# Altium PCB PCB.PcbDoc (part 2 of 5)
Units mil, origin at the board's own origin, x right, y up, seen from the top; angles counter-clockwise.
Board outline 7500 x 6500 mil, 2 copper layers (Top Layer, Bottom Layer); 229 components, 273 nets, 1476 pads, 506 vias.
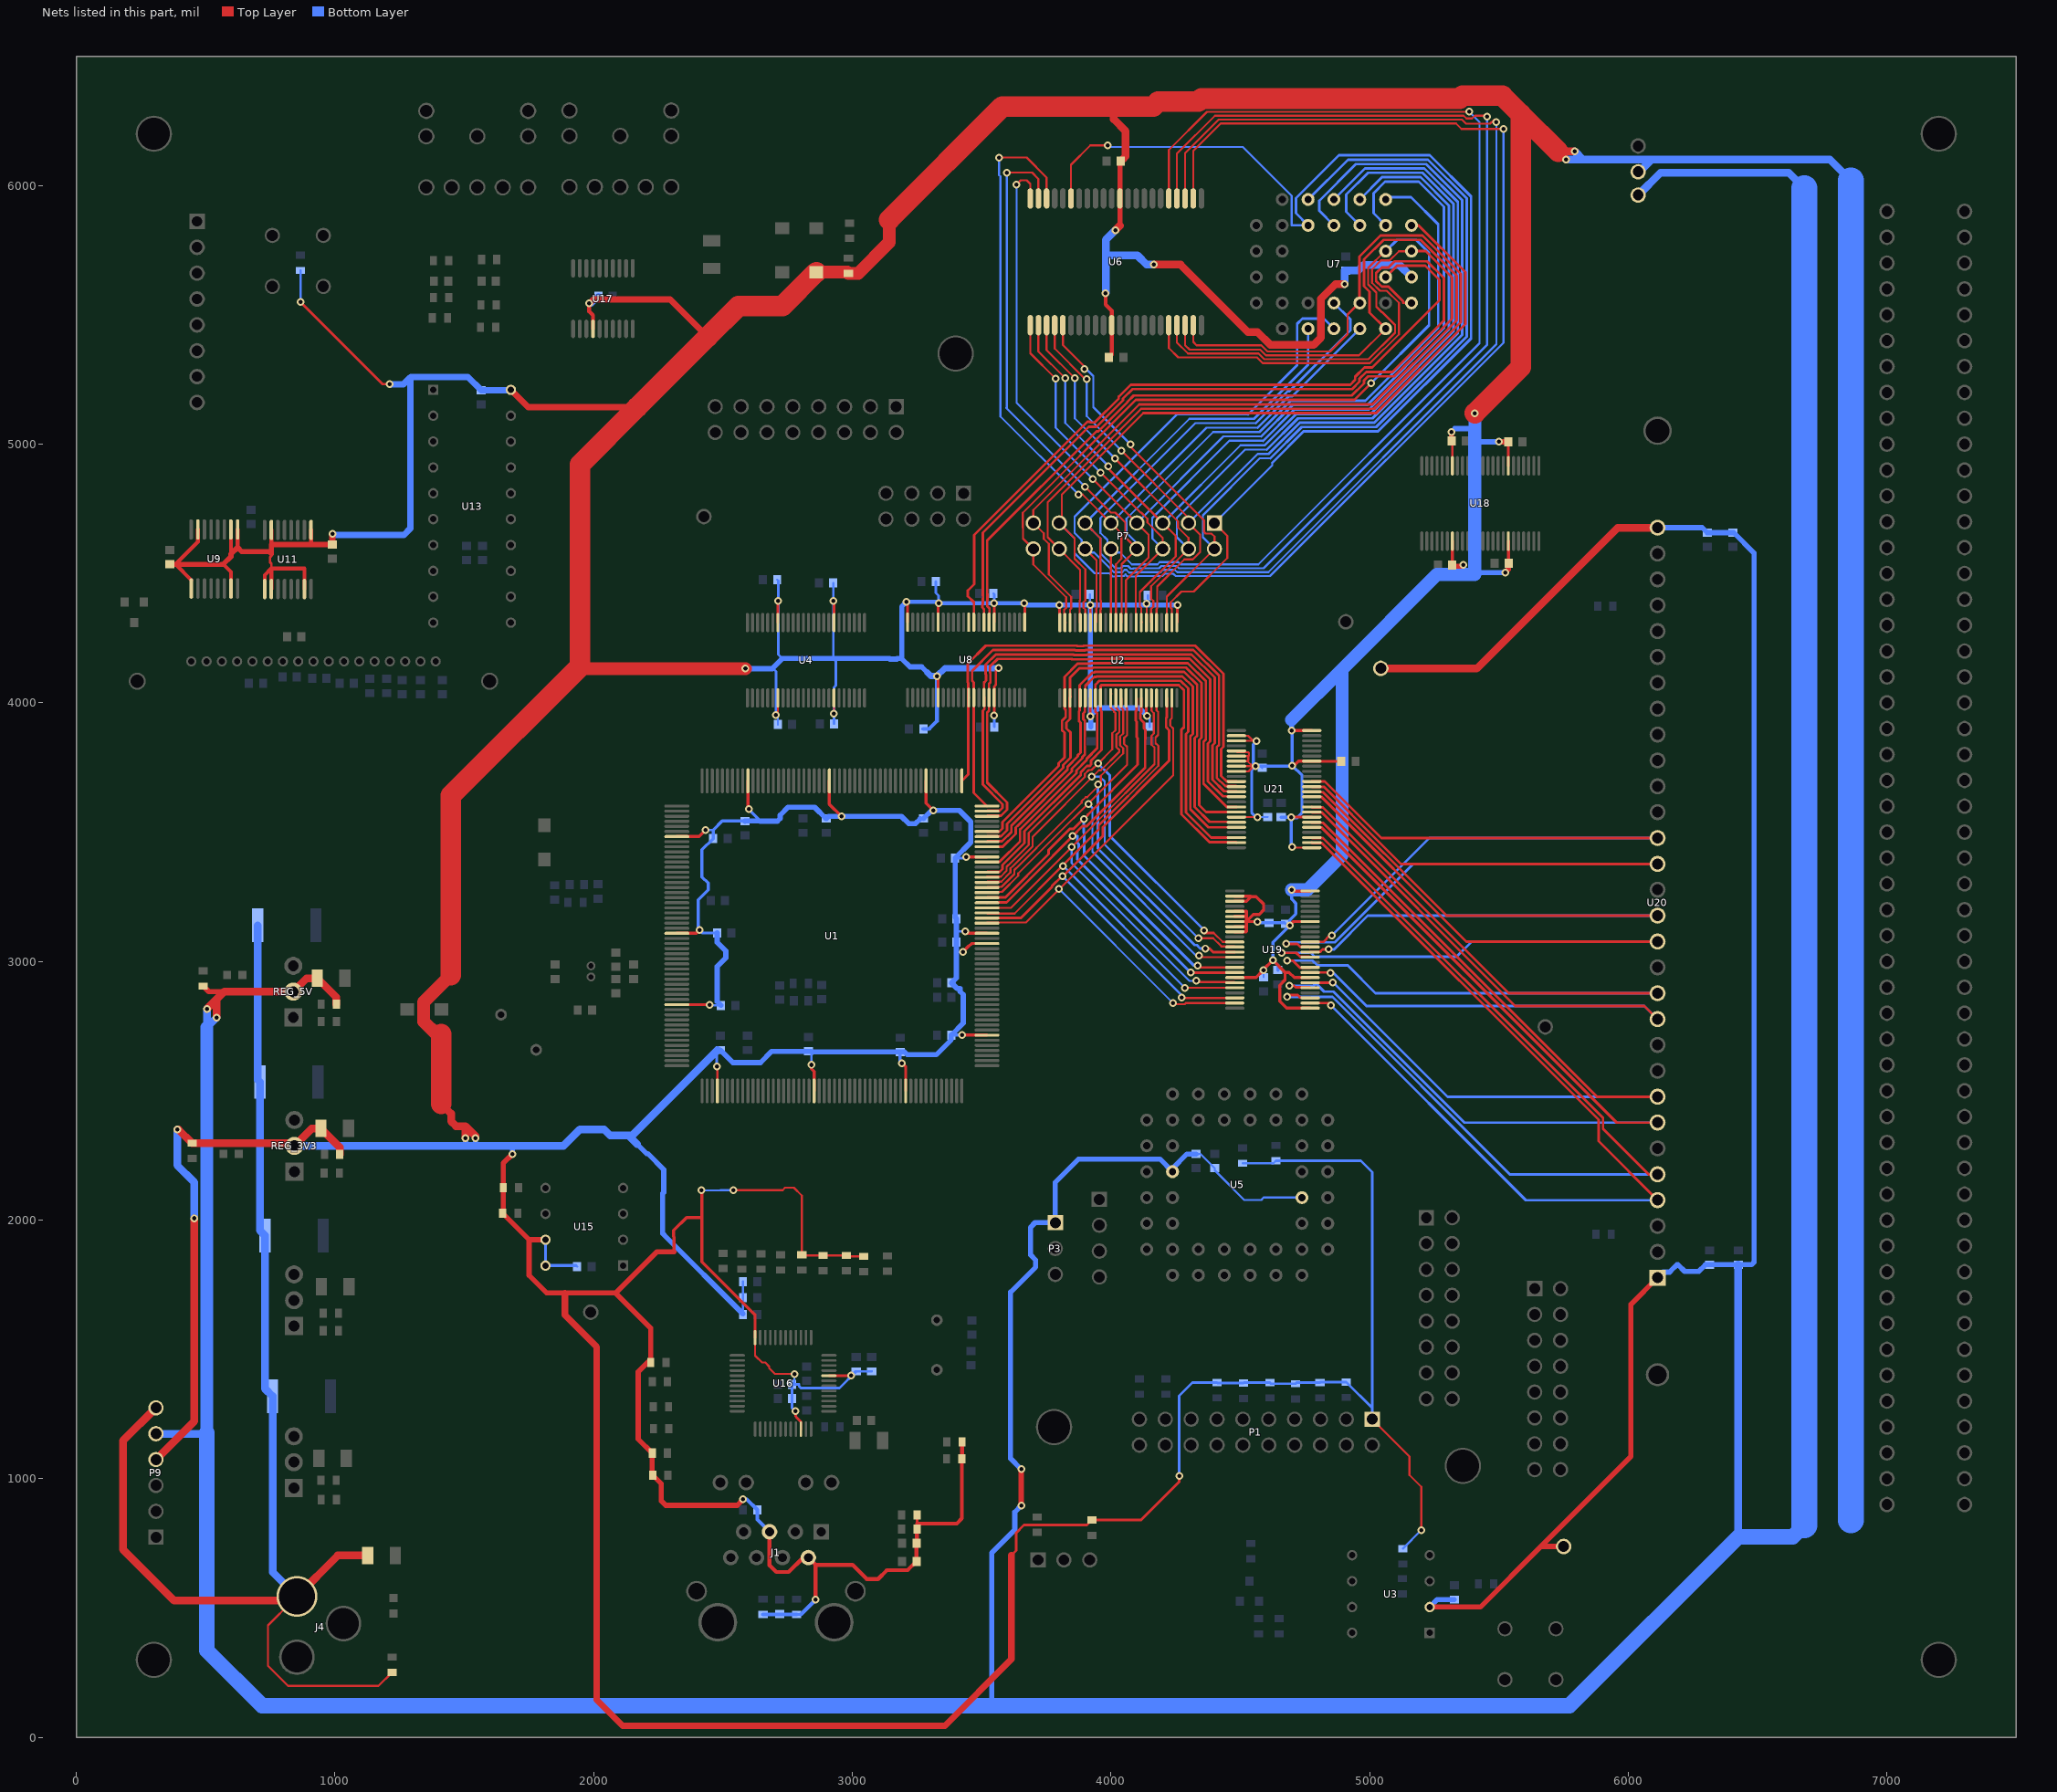
[diagram p2: the nets of this part, all layers, seen from the top]

## Via types
v1: diameter 30, hole 16, Top Layer to Bottom Layer, 500 vias
v2: diameter 30, hole 16, Top Layer to Bottom Layer, tented top, 6 vias

## Nets (pads, with @x,y where several pads share a name; then routed paths per layer and width w, separated by ;. In a path a pad name is that pad's centre, name@x,y a point inside that pad or via, vN(x,y) a via of type N, cw(c..) or ccw(c..) an arc to the next point about the centre after c; other vN are vias at no path point) (continued)
3V3: C1.1 C2.1 C3.1 C4.1 C6.1 C8.1 C10.1 C12.1 C14.1 C16.1 C18.1 C20.1 C21.1 C24.1 C25.1 C33.1 C34.1 C35.1 C36.1 C37.1 C38.1 C49.1 C50.1 C51.1 C52.1 C55.1 C58.1 C67.1 C68.1 C69.1 C70.1 C76.2 C80.1 C81.1 C82.1 C85.1 C86.1 C87.1 C88.1 C89.1 C90.1 C91.1 C92.1 C93.1 C94.1 C95.1 C96.1 C97.1 C98.1 C99.1 C100.1 C101.1 C102.1 C103.1 C104.1 C105.1 C106.1 C107.1 J1.2 J1.5 L1.2 P1.1 P9.4 pad.3V3_TEST_1 R3.2 R5.2 R7.2 R8.2 R9.2 R10.2 R11.2 R12.2 R15.2 R16.2 R17.2 R18.1 R22.1 R23.1 R27.2 R28.1 R29.1 R30.2 R34.2 R41.2 R42.2 R43.2 R44.2 R45.2 R46.2 R51.2 R59.2 R63.2 R70.2 REG_3V3.2 U1.7 U1.26 U1.40 U1.56 U1.75 U1.93 U1.111 U1.129 U1.131 U1.146 U1.164 U1.183 U1.199 U2.1 U2.7 U2.18 U2.24 U2.31 U2.42 U4.7 U4.18 U4.31 U4.42 U6.11 U6.33 U7.32 U8.1 U8.7 U8.18 U8.24 U8.31 U8.42 U9.1 U9.2 U9.7 U9.9 U9.15 U11.1 U11.2 U11.7 U11.9 U11.15 U13.20 U15.7 U15.8 U16.22 U16.32 U16.48 U17.14 U18.7 U18.18 U18.31 U18.42 U19.1 U19.7 U19.18 U19.24 U19.26 U19.27 U19.29 U19.30 U19.31 U19.32 U19.33 U19.42 U21.1 U21.7 U21.18 U21.24 U21.26 U21.27 U21.29 U21.30 U21.31 U21.32 U21.33 U21.42 | length 63039.9
  Top Layer w8: U9.9@444.43,4441.83 U9.9@444.43,4474.45 ; 754.02,4611.98 754.44,4611.56 ; R17.2@1648.47,2026 R17.2@1650.47,2028 ; v1@2413,2112 v1(2416,2115) ; v1(2476,2594) v1@2478.27,2591.73 ; v1(2540,2116) 2731.02,2116 2740.02,2125 2773.98,2125 2805,2093.98 R27.2@2805,1865.53 2807,1863.53 R34.2@2887,1863.53 R30.2@2977,1863.53 2981,1859.53 R23.1@3044,1859.53 ; v1@2577,919 v1(2578,920) ; U16.48@2624.2,1546 2624.2,1476.03 2651.23,1449 2663.77,1449 2679,1433.77 2679,1427.23 2701.23,1405 v1(2776,1405) ; v1(2705,3952) 2707.12,3952 2712.52,3957.4 U4.31@2712.52,4018.66 ; v1@2712.52,4392.52 v1(2714,4394) ; v1(2929.06,3957.94) U4.42@2929.06,4018.66 ; v1(3327,4103) v1@3331.89,4098.11 ; U2.24@3801,4311.21 U2.24@3802.21,4310 ; U2.31@3920,4018.35 U2.31@3920.32,4018.66 ; v1(3920,4378) 3920,4310.32 U2.18@3920.32,4310 ; v1@4136.85,3945.85 v1(4140,3949) ; U2.7@4136.85,4310 4138,4311.15 v1(4138,4383) ; U2.1@4254.96,4310 U2.1@4257,4312.04 ; U21.42@4485,3557.84 4485.16,3558 v1(4566,3558) ; U21.33@4485,3735 4532.12,3735 4549.12,3752 v1@4550,3752 ; U21.32@4485,3754.69 v1@4547.32,3754.69 ; U21.31@4485,3774.37 4527.63,3774.37 ; U21.30@4485,3794.06 4530.95,3794.06 ; U21.29@4485,3813.74 4489.63,3809.11 4530.08,3809.11 4532.19,3807 4533.26,3807 4533.26,3796.37 4530.95,3794.06 ; U21.27@4485,3853.11 v1@4549.89,3853.11 ; U21.26@4485,3872.8 4530.21,3872.8 v1@4549.89,3853.11 ; 4522.32,3173.74 4523.58,3175 ; 4522.95,3134.37 4523.58,3135 ; v1(4558.64,3754.36) 4552.36,3754.36 v1@4550,3752 ; v1(4563,3852) 4551,3852 v1@4549.89,3853.11 ; v1(4691,3139) v1@4701,3139 ; v1(4698,3277) v1@4702.83,3272.17 ; v1(4700,3442) 4702.27,3439.73 U21.1@4776.34,3439.73 ; v1(4701,3757) v1@4708,3757 ; U21.18@4776.34,3774.37 4777.12,3773.59 U21.18@4777.71,3773 ; P1.1@5010,1230 5154,1086 5154,1014.79 5200,968.79 v1(5200,801.53) ; C50.1@5316.44,5012 C50.1@5319.69,5008.76 ; C100.1@5318.56,4532 C100.1@5319.69,4533.13 ; C99.1@5535.44,5009 C99.1@5536.22,5008.22 ; C14.1@5536.22,4541.34 C14.1@5537.56,4540 ; 4522.82,3154.06 4523.58,3154.81 4523.58,3154.06 ; 4522.82,3154.06 4521.52,3154.06 4523.58,3152 4523.58,3154.06 ; 4522.82,3154.06 4523.58,3154.06 ; 4527.63,3774.37 v1@4547.32,3754.69 ; 4527.63,3774.37 4530.95,3777.69 4530.95,3794.06 ; v1@4547.32,3754.69 v1@4550,3752
  Top Layer w10: 754.02,4519 754.02,4538.79 749,4543.82 749,4562.18 754.02,4567.21 754.02,4576 ; REG_3V3.2@832.47,2297.53 REG_3V3.2@843,2287 ; v1(867,5549) 1184,5232 v1(1212,5232) ; v1(2416,2115) v1@2418,2113 ; v1@2447.93,2833.07 v1(2449,2832) ; U1.56@2478.27,2499.41 v1@2478.27,2591.73 ; U4.18@2712.52,4310 v1@2712.52,4392.52 ; v2(2781,1261) 2781,1240.89 2784,1237.89 2801.37,1220.52 U16.22@2801.37,1191.67 ; J1.2@2810,695 J1.2@2830,695 ; U16.32@2909.64,1398.36 v1(2996.36,1398.36) ; v1(2927,4394) 2929.06,4391.94 U4.7@2929.06,4310 ; v1(3209,4390) 3213.78,4385.22 U8.24@3213.78,4311.34 ; C81.1@3248.09,750 C81.1@3250.06,751.97 ; R41.2@3250.06,805 3250.06,827 ; R42.2@3250.06,860 3250.06,827 ; 3250.36,826.69 3250.06,827 ; U8.31@3331.89,4020 v1@3331.89,4098.11 ; U8.18@3331.89,4311.34 v1@3331.89,4382.89 ; R29.1@3423.53,1077 3423.53,1088 R29.1@3424.53,1089 ; v1(3548.43,3951.57) U8.42@3548.43,4020 3548.43,4063.43 3555,4070 3555,4123 v1(3566,4134) ; U8.7@3548.43,4311.34 v1(3548.43,4384.58) ; 3615,704 3633,722 3633,790 3664,821 3907,821 R5.2@3926,840 4116,840 4264,988 v1(4264,1010) ; U8.1@3666.54,4311.34 v1@3666.54,4383.46 ; U2.24@3801,4311.21 v1(3801,4378) ; v1(3920,3948) U2.31@3920,4018.35 ; v1@4136.85,3945.85 U2.42@4136.85,4018.66 ; U2.1@4257,4312.04 v1(4257,4378) ; v1(4697,3558) 4697.16,3557.84 U21.7@4776.34,3557.84 ; U18.18@5319.69,4916.34 C50.1@5319.69,5008.76 ; U18.7@5536.22,4916.34 C99.1@5536.22,5008.22
  Top Layer w12: 2311,1877.53 2311,1934.4 2309,1936.4 2309,1959.6 2359.4,2010 2418,2010 ; U1.40@2321.77,2833.07 v1@2447.93,2833.07 ; U1.26@2321.77,3108.66 2396.66,3108.66 v1(2410,3122) ; U1.7@2321.77,3482.68 2407.68,3482.68 v1(2433,3508) ; v1@2418,2113 2418,2010 ; U1.199@2596.38,3698.23 2596.38,3592.16 v1(2599.98,3588.56) ; U16.48@2624.2,1546 2624.2,1631.8 2418,1838 2418,1933.6 2419,1934.6 2419,2009 2418,2010 ; v1(2842,2600) 2842,2585 2852.28,2574.72 U1.75@2852.28,2499.41 ; U1.183@2911.34,3698.23 2911.34,3607.66 v1(2958,3561) ; v1(3192,2606) 3206.61,2591.39 U1.93@3206.61,2499.41 ; U1.164@3285.35,3698.23 3285.35,3611.65 v1(3313,3584) ; v1(3424.96,2714.96) U1.111@3520.59,2714.96 ; v1(3428,3037) 3450,3059 3451.23,3059 3461.52,3069.29 U1.129@3520.59,3069.29 ; v1(3436.41,3116) 3443.75,3108.66 U1.131@3520.59,3108.66 ; v1(3440.94,3403.94) U1.146@3520.59,3403.94 ; U19.42@4478.66,2937.52 4560.52,2937.52 v1(4590,2967) 4590,2969 v1(4626,3005) 4673,2958 ; U19.33@4478.66,3114.69 4522.23,3114.69 4523.58,3116.03 4523.58,3135 4523.58,3152 ; U19.32@4478.66,3134.37 4522.95,3134.37 ; U19.31@4478.66,3154.06 4521.52,3154.06 ; U19.30@4478.66,3173.74 4522.32,3173.74 ; U19.29@4478.66,3193.43 4523.58,3193.43 4523.58,3175 4523.58,3154.81 4550.77,3182 4573.6,3182 4590,3198.4 4590,3221.6 4560.6,3251 4541.77,3251 ; U19.27@4478.66,3232.8 4523.56,3232.8 4541.77,3251 ; U19.26@4478.66,3252.48 4540.29,3252.48 4541.77,3251 ; 4523.58,3154.06 v1(4566.95,3154.06) ; v1(4691,3139) 4706.06,3154.06 U19.18@4770,3154.06 ; v1(4698,3893) 4698.52,3892.48 U21.24@4776.34,3892.48 ; v1@4702.83,3272.17 U19.24@4770,3272.17 ; v1@4708,3757 4725.37,3774.37 U21.18@4776.34,3774.37 ; U19.1@4770,2819.41 4679.59,2819.41 4653,2846 4653,2908.6 4673,2928.6 4673,2958 ; U19.7@4770,2937.52 4708.48,2937.52 4688,2958 4673,2958 ; U21.18@4777.12,3773.59 4890.44,3773.59 C104.1@4890.44,3773 ; C100.1@5318.56,4532 C100.1@5322.71,4527.85 ; C100.1@5319.69,4533.13 U18.31@5319.69,4625 ; v1@5355.85,4527.85 v1(5362,4534) ; C14.1@5536.22,4541.34 U18.42@5536.22,4625
  Top Layer w15: U9.9@444.43,4474.45 383.44,4535.44 470.02,4622.02 U9.7@470.02,4670.17 ; 568.44,4535.44 597.98,4505.91 U9.15@597.98,4441.83 ; 597.98,4575 U9.2@597.98,4670.17 ; 623.57,4600.59 U9.1@623.57,4670.17 ; U11.1@728.43,4439.83 728.43,4493.41 754.02,4519 ; U11.2@754.02,4439.83 754.02,4519 ; 754.02,4611.98 U11.15@754.02,4668.17 ; U11.7@881.98,4439.83 881.98,4519 754.02,4519 ; 907.57,4611.56 U11.9@907.57,4668.17 ; v1(1983,5544) 1983,5513 1997.59,5498.41 U17.14@1997.59,5445.75 ; J1.5@2680,795 2680,665 2706,639 2754,639 J1.2@2810,695 ; J1.2@2830,695 2858,667 ; v1(2858,532) 2858,667 ; C81.1@3248.09,750 C86.1@3248.09,680 3214.09,646 3133.56,646 3099.56,612 3056,612 3001,667 2858,667 ; C81.1@3250.06,751.97 R41.2@3250.06,805 ; 3250.36,826.69 3403.69,826.69 3423.53,846.53 R29.1@3423.53,1077 ; v1@3331.89,4382.89 v1(3334,4385) ; R29.1@3424.53,1089 R28.1@3424.53,1142 ; v1(3979,5584) 3979,5539 4003,5515 U6.11@4003,5460 4003,5345.56 C24.1@3992.44,5335
  Top Layer w20: C10.1@362,4535.44 383.44,4535.44 568.44,4535.44 597.98,4564.98 597.98,4575 623.57,4600.59 640.16,4584 746.02,4584 754.02,4576 754.02,4611.98 ; 754.44,4611.56 907.57,4611.56 C16.1@990,4611.56 ; v1(1543,2316) v1@1543,2325 ; R17.2@1648.47,2026 1750.47,1924 ; R17.2@1650.47,2028 R16.2@1650.47,2126 1650.47,2219.47 v1(1686,2255) ; U15.7@1814,1924 1750.47,1924 ; 2311,1877.53 2244.53,1877.53 2085,1718 ; v1@2577,919 2555,897 2279,897 2262,914 2262,980.47 R22.1@2228.47,1014 2226.47,1016 R18.1@2226.47,1099 2172,1153.47 2172,1413 2209,1450 R59.2@2220.94,1450 2220.94,1582.06 2085,1718 ; R63.2@2980.47,5665 R63.2@2985,5660.47 ; v1(3664.78,4385.22) v1@3666.54,4383.46 ; 4035,5845 4035,5949.57 U6.33@4034.5,5950.08 4034.5,6090.94 C3.1@4037.56,6094 C3.1@4046,6102.44 ; C50.1@5316.44,5012 v1(5316.44,5047.44) ; C100.1@5322.71,4527.85 v1@5355.85,4527.85 ; v1(5499,5009) C99.1@5535.44,5009 ; v1(5524,4503) 5536.22,4515.22 C14.1@5536.22,4541.34 ; 5729.5,6130.5 5731,6132 ; 1750.47,1924 1750.47,1786.53 1819,1718 1889,1718 2085,1718
  Top Layer w25: C16.1@990,4611.56 v1(990,4653) ; U13.20@1680,5210 1747,5143 2169,5143 ; 1889,1718 1889,1633 2012,1510 2012,145 2112,45 3358,45 3615,302 3615,704 ; v1(1983,5544) 1999,5560 2296,5560 2441,5415
  Top Layer w30: P9.4@308,1074 456,1222 v1(456,2007) ; v1(390,2350) 395.53,2350 R70.2@448,2297.53 REG_3V3.2@832.47,2297.53 ; REG_3V3.2@843,2287 910,2354 C76.2@945.85,2354 1018.53,2281.32 R51.2@1018.53,2254 ; 1411,2449.62 1449,2411.62 1449,2382 1468,2363 1505,2363 ; v1(1505,2316) 1505,2363 ; v1@1543,2325 1505,2363 ; 1947,4140 1955,4132 ; 4011,6305 4011,6256 4057,6210 4057,6113.44 C3.1@4046,6102.44 ; v1(4017,5827) 4035,5845 ; v1(4165,5694) 4269,5694 4530,5433 4567,5433 4616,5384 4784,5384 4812,5412 4812,5562.47 4867.53,5618 v1(4903,5618) ; 5729.5,6130.5 v1(5760,6100) ; 5731,6132 v1(5793,6132)
  Top Layer w50: 1411,2719.49 1391.51,2719.49 1343,2768 1343,2842.51 1448,2947.51 ; 1955,4132 v1(2587,4132) ; L1.2@2860.94,5665 R63.2@2980.47,5665 ; R63.2@2985,5660.47 3022.47,5660.47 3143,5781 3143,5868
  Top Layer w80: 1411,2449.62 1411,2719.49 ; 1448,2947.51 1448,3641 1947,4140 1947,4921 2169,5143 2441,5415 2560,5534 2729.94,5534 L1.2@2860.94,5665 ; 3143,5868 3580,6305 4011,6305 4163.25,6305 4182.25,6324 4337.88,6324 4349.88,6336 5348.32,6336 5359.32,6347 5513,6347 5584,6276 ; v1(5407,5120) 5584,5297 5584,6276 ; 5729.5,6130.5 5584,6276
  Bottom Layer w8: U13.20@1678.56,5208.56 U13.20@1680,5210 ; C2.1@1932.44,1824 C2.1@1936.44,1820 ; v1(2416,2115) 2492,2115 2491,2116 v1(2540,2116) ; v1(2449,2832) 2451,2830 C67.1@2492.44,2830 ; 2462.4,3508 2462.44,3508.04 ; C51.1@2476,2643.44 C51.1@2478.27,2645.71 ; v1(2578,920) v1@2592.56,920 ; v1(2705,3952) 2707,3952 2708,3953 2712.44,3948.56 C55.1@2712.44,3916 ; C20.1@2709.56,4476 C20.1@2714,4471.56 ; C89.1@2767.56,1365 2776,1373.44 v1(2776,1405) ; C58.1@2925.56,4463 C58.1@2927,4461.56 ; 2927,4172 2926,4171 2929.06,4167.95 2932,4165 ; v1@2929.56,3957.44 v1(2929.06,3957.94) v1@2935.37,3964.26 ; C34.1@3382.56,2715 C34.1@3382.56,2715 ; 3402.56,3036 3427,3036 v1(3428,3037) ; 3402.56,3107 3411.56,3116 v1(3436.41,3116) ; C80.1@3545.12,4423 C80.1@3548.43,4419.69 ; v1@3548,4385 v1(3548.43,4384.58) v1@3548.43,4385.22 ; C95.1@3548.43,3907.13 C95.1@3549.56,3906 ; v1@3918.56,4379.44 C97.1@3918.56,4419 ; C38.1@3920,3909 C38.1@3922,3907 ; v1(4140,3949) v1@4150,3939 ; v1@4142.44,4387.44 C96.1@4142.44,4415 ; R46.2@4509,2219.47 4628,2219.47 R45.2@4638,2229.47 ; v1(4558.64,3754.36) 4578.2,3754.36 4580.56,3752 4581,3752.44 C103.1@4585,3748.44 ; v1@4561.79,3558 v1(4566,3558) 4605.88,3558 C102.1@4606,3557.88 ; v1(4566.95,3154.06) v1@4571.56,3149.44 ; C106.1@4590,2938.56 v1(4590,2967) ; C33.1@4670.44,3149.44 C33.1@4675,3144.88 4680.88,3139 v1(4691,3139) ; v1(4698,3893) v1@4701,3890 ; C12.1@4903,5671 4903.12,5670.88 C12.1@4907,5670.88 ; R3.2@5128,729.53 v1(5200,801.53) ; 5360,4496 5361,4497 ; 5406.44,5006 5409.44,5009 ; C51.1@2478.27,2645.71 2478.27,2656.87 2478.84,2657.44 C51.1@2490,2657.44 C51.1@2478.27,2645.71
  Bottom Layer w10: v1(867,5549) R15.2@867,5671.47 ; v1(2433,3508) 2462.4,3508 ; v1(2476,2594) C51.1@2476,2643.44 ; C87.1@2577.44,1635 2580,1635 2578.72,1636.28 2577.44,1637.56 C88.1@2577.44,1700 C91.1@2577.44,1762 ; 2644.25,3543 2644.69,3542.56 ; 2692,4134 2705,4121 v1(2705,3952) ; C20.1@2714,4471.56 v1(2714,4394) 2714,4186 2729,4171 ; C82.1@2718.03,475.47 C82.1@2720,477.44 C82.1@2721.97,475.47 ; v2(2781,1261) 2780.18,1261 2767.56,1273.62 C90.1@2767.56,1310 C89.1@2767.56,1365 2794.28,1365 2794.28,1357.72 2801.31,1350.69 2950.69,1350.69 C93.1@3014.88,1414.88 ; R43.2@2785,475.47 R43.2@2801.47,475.47 ; C101.1@2840,2652.44 2842,2650.44 v1(2842,2600) ; 2926,4171 2932,4165 2936.37,4160.63 2936.37,4067.19 2929.06,4059.87 v1(2929.06,3957.94) ; 2927,4172 v1(2927,4394) C58.1@2927,4461.56 ; C35.1@2929.56,3919 v1@2929.56,3957.44 ; v1@2958,3559 v1(2958,3561) ; v1(2996.36,1398.36) 3012.88,1414.88 C93.1@3014.88,1414.88 ; C93.1@3015,1414.88 C93.1@3014.88,1414.88 ; C92.1@3075,1414.88 3074.88,1415 3015,1415 C93.1@3014.88,1414.88 ; C94.1@3322.56,4469 3322.56,4425.22 3333.78,4414 v1@3333.78,4385.22 ; v1@3327,4390 v1@3331,4386 ; C8.1@3397.56,3400 3437,3400 v1(3440.94,3403.94) ; C95.1@3548.43,3907.13 v1(3548.43,3951.57) ; v1@3548.43,4385.22 C80.1@3548.43,4419.69 ; C98.1@4150,3907.56 v1@4150,3939 ; v1(4264,1010) 4264,1321 4314.53,1371.53 R7.2@4410,1371.53 4412,1369.53 R8.2@4512,1369.53 4514,1371.53 R9.2@4614,1371.53 4618,1367.53 R10.2@4714,1367.53 4718,1371.53 R11.2@4808,1371.53 4810,1373.53 R12.2@4910,1373.53 5010,1273.53 ; R45.2@4638,2229.47 4965.53,2229.47 5010,2185 5010,1273.53 ; P1.1@5010,1230 5010,1273.53
  Bottom Layer w12: U15.7@1814,1924 U15.8@1814,1824 C2.1@1932.44,1824 ; C52.1@2477.44,3110 2422,3110 v1(2410,3122) 2404,3128 2404,3238.41 2443,3277.41 2443,3302.6 2419,3326.6 2419,3431.56 C68.1@2462.44,3475 2462.44,3508.04 2496.96,3542.56 C69.1@2585,3542.56 ; v1(2599.98,3588.56) 2599.98,3587.28 2644.25,3543 ; C25.1@3185,2649.88 3185,2613 v1(3192,2606) ; C34.1@3382.56,2715 v1(3424.96,2714.96) ; v1@4561.79,3558 4544,3575.79 4544,3739.72 v1(4558.64,3754.36) 4550,3763 4550,3839 v1(4563,3852) ; v1@4571.56,3149.44 C105.1@4612,3149.44 C33.1@4670.44,3149.44 ; C103.1@4578.2,3754.36 4698.36,3754.36 v1(4701,3757) ; C107.1@4645,2966.56 4645,2986 v1(4626,3005) 4626,3074 v1(4691,3139) 4691,3160 4715,3184 4715,3224.77 4698,3241.77 v1(4698,3277) ; C18.1@4658,3558.44 4658.44,3558 v1(4697,3558) ; v1(4700,3442) 4697,3445 v1(4697,3558) ; v1@4701,3890 v1(4701,3757) ; 5361,4497 5362,4498 ; v1(4697,3558) 4698.83,3556.17 4720,3556.17 4738.43,3574.6 4738.43,3719.57 v1(4701,3757)
  Bottom Layer w15: v1@2592.56,920 C85.1@2632.56,880 2632.56,842.44 J1.5@2680,795 ; R44.2@2655,475.47 C82.1@2718.03,475.47 ; C82.1@2721.97,475.47 R43.2@2785,475.47 ; R43.2@2801.47,475.47 v1(2858,532) ; v1(3209,4390) v1@3327,4390 ; C6.1@3274.56,3899 3297,3899 3327,3929 v1(3327,4103) ; v1@3331,4386 v1@3331.78,4385.22 ; v1(3664.78,4385.22) 3548.43,4385.22 v1@3333.78,4385.22 ; v1@3331.78,4385.22 3332,4385 v1(3334,4385) v1@3333.78,4385.22 ; v1@3331.78,4385.22 v1@3333.78,4385.22
  Bottom Layer w20: 1505,2287 v1(1505,2316) ; 1543,2287 v1(1543,2316) ; 1680,2287 1686,2281 v1(1686,2255) ; 2168.56,2293.14 2204.38,2257.31 2208.97,2257.31 2271.06,2195.23 2271.06,2107.31 2267,2103.25 2267,1948 2271.06,1943.94 C87.1@2577.44,1637.56 ; C52.1@2477.44,3110 2477.44,3073.81 2511,3040.25 2511,3013.75 2477.44,2980.19 2477.44,2845 C67.1@2492.44,2830 ; C51.1@2490,2657.44 2538.44,2609 2645,2609 2688.44,2652.44 2705.3,2652.44 2705.75,2652 2839.56,2652 C101.1@2840,2652.44 ; C69.1@2585,3542.56 2585.44,3543 2644.25,3543 ; v1(2587,4132) 2690,4132 2692,4134 2729,4171 2926,4171 3143.75,4171 3145.75,4169 3172.25,4169 3174.25,4171 3191,4171 ; 2644.69,3542.56 2710.56,3542.56 2721,3553 2721,3565.25 2751.75,3596 2854.17,3596 2897.61,3552.56 C70.1@2900,3552.56 2908.44,3561 v1(2958,3561) 3189.75,3561 3217.75,3533 3244.25,3533 C49.1@3263,3551.75 ; C101.1@2842,2650.44 2842.56,2649.88 C25.1@3185,2649.88 3202.46,2649.88 3213.05,2639.3 3324.3,2639.3 3382.56,2697.56 C34.1@3382.56,2715 3429,2761.44 3429,2871.56 3416.31,2884.25 3416.31,2895.72 3404.84,2895.72 C37.1@3383.56,2917 3402.56,2936 3402.56,3036 C4.1@3402.56,3075 3402.56,3107 C36.1@3402.56,3165 3397.56,3170 C8.1@3397.56,3400 3458,3460.44 3458,3540 3414,3584 v1(3313,3584) 3306.44,3584 C49.1@3275,3552.56 ; v1(3209,4390) 3191,4372 3191,4171 ; 3289,4118 3268,4139 3223,4139 3191,4171 ; v1(3664.78,4385.22) 3672,4378 v1(3801,4378) v1(3920,4378) ; v1@3918.56,4379.44 v1(3920,4378) ; C38.1@3922,3907 3922,3946 v1(3920,3948) ; 3936.56,4377.44 3936,4378 ; v1(3979,5584) v1@3980,5585 ; v1(4140,3949) 4109,3980 3952,3980 v1(3920,3948) ; v1@4142.44,4387.44 v1(4138,4383) v1@4133,4378 ; v1(4257,4378) v1@4133,4378 ; v1(4698,3893) 4698,3934 ; v1(5316.44,5047.44) 5329,5060 5406.44,5060 5407,5060.56 ; 5362,4498 v1(5362,4534) ; 5406.44,4496 5413.44,4503 v1(5524,4503) ; 5409.44,5009 v1(5499,5009) ; v1(3920,3948) v1(3920,4378) ; v1(3920,4378) 3936,4378 ; 3936,4378 v1@4133,4378
  Bottom Layer w25: v1(990,4653) 993.5,4649.5 1267.5,4649.5 1291,4673 1291,5258 ; v1(1212,5232) 1265,5232 1291,5258 ; U13.20@1678.56,5208.56 C21.1@1566,5208.56 1514.56,5260 1293,5260 1291,5258 ; v1(1983,5544) 1990.44,5544 C1.1@2018.44,5572 ; 3289,4118 3304,4103 v1(3327,4103) 3358,4134 v1(3566,4134) ; 3980,5731 3981,5730 ; pad.3V3_TEST_1@6038,6053 pad.3V3_TEST_1@6043,6053
  Bottom Layer w30: v1(390,2350) 390,2212 456,2146 v1(456,2007) ; REG_3V3.2@843,2287 1505,2287 1543,2287 1680,2287 1883.35,2287 1947.34,2350.99 2040.34,2350.99 2064.33,2327 2134.7,2327 ; 2168.56,2293.14 2134.7,2327 ; C51.1@2478.27,2656.87 2148.4,2327 2134.7,2327 ; v1@3980,5585 3980,5731 3980,5790 v1(4017,5827) ; 3981,5730 4102,5730 4138,5694 v1(4165,5694) ; v1(4903,5618) 4903.12,5618.12 4903.12,5670.88 C12.1@4907,5670.88 4954.88,5670.88 4977,5693 5115,5693 U7.32@5162,5646 ; v1(5760,6100) 5825,6100 ; v1(5793,6132) 5825,6100 ; pad.3V3_TEST_1@6043,6053 6090,6100 ; 6860,6020 6780,6100 6090,6100 ; 5825,6100 6090,6100
  Bottom Layer w50: v1(4698,3277) 4759.09,3277 4893,3410.91 4893,4129 ; 4698,3934 4893,4129 ; 5406.44,5060 5406.44,5006 5406.44,4496 5360,4496 5260,4496 4893,4129 ; 5407,5060.56 v1(5407,5120)
  Bottom Layer w100: 6860,840 6860,6020
5V: C32.1 C56.1 C57.1 C74.2 C75.1 C77.1 C83.1 C84.1 P3.1 P9.5 pad.5V_Test_2 pad.5V_TEST_2 R49.2 R69.2 REG_5V.2 U3.2 U5.12 U5.34 U20.1 U20.30 | length 27136.6
  Top Layer w20: R69.2@491,2904.47 512.47,2883 572,2883 ; v1(3653,896) v1(3653,1037) ; pad.5V_Test_2@5043,4133 pad.5V_Test_2@5044,4132 ; U3.2@5232,504 5428,504 5662,738 ; pad.5V_Test_2@5750,738 5662,738 ; U20.1@6113,1777 6010,1674 6010,1086 5662,738
  Top Layer w30: v1(505,2816) 572,2883 REG_5V.2@839,2883 891,2935 C74.2@931.85,2935 1005.53,2861.32 R49.2@1005.53,2834 ; v1(542,2782) 542,2845 ; pad.5V_Test_2@5044,4132 5414,4132 5959,4677 U20.30@6113,4677
  Bottom Layer w8: C57.1@4329,2255.56 4345.88,2255.56 C56.1@4401,2200.44 4401,2192.23 4515.23,2078 4580.77,2078 4589.77,2087 U5.12@4738,2087
  Bottom Layer w20: 3539,123 3539,713.75 3628,802.75 3628,871 v1(3653,896) ; v1(3653,1037) 3612,1078 3612,1721.75 3709,1818.75 3709,1845.25 3689,1865.25 3689,1972 3707,1990 P3.1@3785,1990 3785,2146 3875,2236 4189,2236 U5.34@4238,2187 4238,2200 4293.56,2255.56 C57.1@4329,2255.56 ; U3.2@5232,504 5260.44,532.44 C32.1@5327,532.44 ; U20.1@6113,1777 6135,1799 6159.56,1799 6162.56,1802 6188,1827.44 6192.14,1827.44 6217.89,1801.69 6272.32,1801.69 6298.07,1827.44 C84.1@6315,1827.44 C77.1@6425,1827.44 6476.44,1827.44 6486,1837 6486,4578.95 6407.39,4657.56 C75.1@6405,4657.56 C83.1@6305,4657.56 6285.56,4677 U20.30@6113,4677
  Bottom Layer w30: P9.5@308,1174 502,1174 505,1177 ; v1(505,2816) 505,2745 v1(542,2782) ; pad.5V_TEST_2@6038,5963 6125,6050 6620,6050 6680,5990 ; 6425,775 C77.1@6425,1827.44
  Bottom Layer w50: 505,1177 505,2745
  Bottom Layer w60: 505,1177 505,336 718,123 3539,123 5773,123 6425,775 6635,775 6680,820
  Bottom Layer w100: 6680,820 6680,5990
12V: C71.2 J4.VCC P9.6 R58.1 R60.2 R61.2 R62.2 R68.2 | length 5183.6
  Top Layer w8: J4.VCC@853,545 837,529 741,433 741,277 819,199 1168.53,199 R68.2@1221,251.47
  Top Layer w30: P9.6@308,1274 181,1147 181,726 378,529 J4.VCC@837,529 ; J4.VCC@853,545 1011,703 C71.2@1126.85,703
  Bottom Layer w30: R60.2@701.8,3140 701.8,2542 R61.2@709.8,2534 709.8,1960 R62.2@729.8,1940 729.8,1348 R58.1@758.8,1319 758.8,639.2 J4.VCC@853,545
A_3V3_BUF_0: P7.1 U2.2 U6.39 U7.12 | length 4577
  Top Layer w8: U6.39@3845.52,5950.08 3845.52,6080.52 3920,6155 v1(3987,6155) ; U2.2@4235.28,4310 4235.28,4362.96 4231,4367.23 4231,4388.77 4272.23,4430 4320,4430 4450,4560 4450,4645 P7.1@4400,4695
  Bottom Layer w8: v1(3987,6155) 3993,6149 4509.91,6149 4699,5959.91 4699,5846 U7.12@4762,5846 ; P7.1@4400,4695 4623.42,4918.42 4623.42,4928
  Bottom Layer w10: 4623.42,4928 4744.42,5049 5032.29,5049 5392,5408.71 5392,5957.25 5232.25,6117 4880.67,6117 4715,5951.33 4715,5893 U7.12@4762,5846
A_3V3_BUF_1: P7.2 U2.3 U6.5 U7.11 | length 4213.2
  Top Layer w8: U6.5@3814.02,5460 3814.02,5382.98 3898,5299 v1(3898,5291) ; v1(4075,5000) 4075,4990 4359.47,4705.53 4359.47,4660.92 4365.92,4654.47 4387.94,4654.47 4400,4642.42 P7.2@4400,4595 4215.59,4410.59 U2.3@4215.59,4310
  Bottom Layer w8: v1(3898,5291) 3903.77,5291 3932,5262.77 3932,5143 v1(4075,5000) ; P7.2@4400,4595 4355,4640 4355,4724.61 4575.39,4945 4616.37,4945
  Bottom Layer w10: 4616.37,4945 4737.37,5066 5025.25,5066 5375,5415.75 5375,5950.21 5225.21,6100 4916,6100 U7.11@4762,5946
A_3V3_BUF_2: P7.3 U2.5 U6.4 U7.10 | length 4144
  Top Layer w8: U6.4@3782.53,5460 3782.53,5369.7 3900.23,5252 v1(3906,5252) ; v1(4040,4975) 4300,4715 P7.3@4300,4695 4345,4650 4345,4582.69 4316.79,4554.47 4283.7,4554.47 4179,4449.77 4179,4366.02 4176.22,4363.24 U2.5@4176.22,4310
  Bottom Layer w8: v1(3906,5252) 3906,5109 v1(4040,4975) ; P7.3@4300,4695 4567,4962 4609.33,4962
  Bottom Layer w10: 4609.33,4962 4730.33,5083 5018.21,5083 5358,5422.79 5358,5943.17 5218.17,6083 4946.67,6083 4805,5941.33 4805,5903 U7.10@4862,5846
A_3V3_BUF_3: P7.4 U2.6 U6.3 U7.9 | length 4055.1
  Top Layer w8: U6.3@3751.03,5460 3751.03,5363.97 v1(3860,5255) ; v1(4015,4945) 4259.47,4700.53 4259.47,4678.21 4300,4637.69 P7.4@4300,4595 4155,4450 4155,4402.77 4164,4393.77 4164,4372.23 4155,4363.23 4155,4311.54 U2.6@4156.54,4310
  Bottom Layer w8: v1(3860,5255) 3860,5100 v1(4015,4945) ; P7.4@4300,4595 4255,4640 4255,4715 4519,4979 4602.29,4979
  Bottom Layer w10: 4602.29,4979 4723.29,5100 5011.17,5100 5341,5429.83 5341,5936.12 5211.12,6066 4981.96,6066 U7.9@4862,5946
A_3V3_BUF_4: P7.5 U2.8 U6.2 U7.8 | length 3994.1
  Top Layer w8: U6.2@3719.54,5460 3719.54,5358.46 v1(3823,5255) ; v1(3990,4915) 3990,4905 P7.5@4200,4695 4250,4645 4250,4566.21 4112,4428.21 4112,4372.23 4117.17,4367.07 U2.8@4117.17,4310
  Top Layer w10: U2.8@4117.17,4310 U2.8@4118.94,4311.78
  Bottom Layer w8: v1(3823,5255) 3823,5082 v1(3990,4915) ; P7.5@4200,4695 4501,4996 4595.25,4996
  Bottom Layer w10: 4595.25,4996 4716.25,5117 5004.12,5117 5324,5436.88 5324,5929.08 5204.08,6049 4994,6049 4910,5965 4910,5898 U7.8@4962,5846
A_3V3_BUF_5: P7.6 U2.9 U6.1 U7.7 | length 3904.8
  Top Layer w8: U6.1@3688.04,5460 3688.04,5350.96 v1(3786,5253) ; v1(3960,4890) 4114.47,4735.53 4116.79,4735.53 4140.53,4711.79 4140.53,4697.16 4200,4637.69 P7.6@4200,4595 4095.7,4490.7 4095.7,4311.78 U2.9@4097.48,4310
  Bottom Layer w8: v1@3783,5259 3786,5256 v1(3786,5253) 3786,5064 v1(3960,4890) ; P7.6@4200,4595 4160,4635 4160,4677.16 4159.47,4677.69 4159.47,4714.47 4458,5013 4588.21,5013
  Bottom Layer w10: 4588.21,5013 4709.21,5134 4997.08,5134 5307,5443.92 5307,5922.04 5197.04,6032 5048,6032 U7.7@4962,5946
A_3V3_BUF_6: P7.7 U2.11 U6.44 U7.6 | length 4505.8
  Top Layer w8: v1(3635,6004) 3651,6020 3674,6020 3688.04,6005.96 U6.44@3688.04,5950.08 ; v1(3930,4865) P7.7@4100,4695 4145,4650 4145,4561.21 4058.11,4474.32 U2.11@4058.11,4310
  Bottom Layer w8: v1(3635,6004) 3635,5160 v1(3930,4865) ; P7.7@4100,4695 4435,5030 4581.17,5030
  Bottom Layer w10: 4581.17,5030 4702.17,5151 4990.04,5151 5287,5447.96 5287,5918 5190,6015 5060,6015 5015,5970 5015,5893 U7.6@5062,5846
A_3V3_BUF_7: P7.8 U2.12 U6.43 U7.5 | length 4500.3
  Top Layer w8: v1@3595,6056.77 3597,6054.77 v1(3597,6050) 3695,6050 3719.54,6025.46 U6.43@3719.54,5950.08 ; v1(3900,4835) 3999.47,4735.53 4016.79,4735.53 4055,4697.31 4055,4640 P7.8@4100,4595 4041.2,4536.2 4041.2,4310 U2.12@4038.43,4310
  Top Layer w10: U2.12@4038.43,4310 U2.12@4040,4311.58
  Bottom Layer w8: v1(3597,6050) 3597,5142 3595,5140 v1(3900,4835) ; P7.8@4100,4595 4100,4617.16 4059.47,4657.69 4059.47,4711.79 4394.69,5047 4574.12,5047
  Bottom Layer w10: 4574.12,5047 4695.12,5168 4983,5168 5265,5450 5265,5850 5160,5955 5071,5955 U7.5@5062,5946
A_3V3_BUF_8: P7.9 U2.13 U6.42 U7.27 | length 3581.9
  Top Layer w8: v1(3567,6108) 3674,6108 3751.03,6030.97 U6.42@3751.03,5950.08 ; v1(3875,4805) 3890,4805 P7.9@4000,4695 4040,4655 4040,4633.79 4040.53,4633.26 4040.53,4556.74 4018.74,4534.95 U2.13@4018.74,4310
  Bottom Layer w8: v1(3567,6108) 3567,6040.77 3573,6034.77 3573,5107 v1(3875,4805) ; P7.9@4000,4695 4369,5064 4567.08,5064
  Bottom Layer w10: 4567.08,5064 4688.08,5185 4701,5185 U7.27@4962,5446
A_3V3_BUF_9: P7.10 U2.14 U6.27 U7.26 | length 5960.1
  Top Layer w8: U2.14@3999.06,4310 4000,4310.95 P7.10@4000,4595 ; U6.27@4223.47,5950.08 4223.47,6137.47 4371,6285 v1(5385,6285)
  Bottom Layer w8: 4560.04,5081 4326,5081 3959.47,4714.47 3959.47,4656.74 3986.34,4629.87 3986.34,4617.44 3981.95,4613.05 P7.10@4000,4595 4018.05,4576.95 4022.44,4581.34 4034.87,4581.34 4081.21,4535 4179.38,4535 4188.38,4544 4259.62,4544 4268.62,4535 4570,4535 5425,5390 5425,6245 v1(5385,6285)
  Bottom Layer w10: 4560.04,5081 4684.04,5205 4690,5205 4925,5440 4925,5483 U7.26@4862,5546
A_3V3_BUF_10: P7.11 U2.16 U6.26 U7.23 | length 6031.4
  Top Layer w8: P7.11@3900,4695 3959.47,4635.53 3959.47,4396.51 3961,4394.98 3961,4361.02 3959.47,4359.49 3959.47,4307.57 3959.69,4307.78 U2.16@3959.69,4310 ; U6.26@4254.97,5950.08 4254.97,6122.97 4402,6270 5363.23,6270 5374.23,6259 5395.77,6259 5406.77,6270 5450,6270 v1(5454,6266)
  Top Layer w10: U2.16@3959.69,4310 U2.16@3960,4310.32
  Bottom Layer w8: 4553,5098 4303,5098 P7.11@3900,4695 3959.47,4635.53 3959.47,4578.21 4017.69,4520 4037.72,4520 4046.72,4529 4066,4529 4076.66,4518.34 4085.77,4518.34 4087.43,4520 4185.59,4520 4194.59,4529 4253.41,4529 4262.41,4520 4590,4520 5455,5385 5454,5386 v1(5454,6266)
  Bottom Layer w10: 4553,5098 4762,5307 U7.23@4762,5446
A_3V3_BUF_11: P7.12 U2.17 U6.25 U7.25 | length 6201.2
  Top Layer w8: P7.12@3900,4595 3944.47,4550.53 3944.47,4390.3 3946,4388.77 3946,4367.23 3944.47,4365.7 3942.78,4364.01 3942.78,4312.78 U2.17@3940,4310 ; U6.25@4286.46,5950.08 4286.46,6125.46 4416,6255 5357.02,6255 5373.02,6239 5465.77,6239 5480.88,6254.12 v1(5490,6245)
  Bottom Layer w8: 4530,5115 4255,5115 3859.47,4719.47 3859.47,4656.74 3886.34,4629.87 3886.34,4617.44 3881.95,4613.05 P7.12@3900,4595 3918.05,4576.95 3922.44,4581.34 3934.87,4581.34 4011.21,4505 4043.93,4505 4052.93,4514 4059.79,4514 4070.44,4503.34 4091.98,4503.34 4093.64,4505 4191.8,4505 4200.8,4514 4247.2,4514 4256.2,4505 4608.79,4505 5490,5386.21 v1(5490,6245)
  Bottom Layer w10: 4530,5115 4720,5305 4720,5465 4740,5485 4823,5485 U7.25@4862,5446
A_3V3_BUF_12: P7.13 U2.19 U6.24 U7.4 | length 7355.8
  Top Layer w8: P7.13@3800,4695 P7.13@3810,4685 ; U2.19@3900.63,4310 3900.63,4360.6 3894,4367.23 3894,4388.77 3900.63,4395.4 3900.63,4515.58 3859.47,4556.74 3859.47,4635.53 P7.13@3810,4685 ; 4125,5120 3810,4805 P7.13@3810,4685 ; U6.24@4317.96,5950.08 4317.96,6133.96 4424,6240 5333.79,6240 5354.79,6219 v1(5517,6219)
  Top Layer w10: 4125,5120 5025.21,5120 5370,5464.79 5370,5665.21 5189.21,5846 U7.4@5162,5846
  Bottom Layer w8: P7.13@3800,4695 3859.47,4635.53 3859.47,4578.21 3936.69,4501 3994,4501 4006.66,4488.34 4015.77,4488.34 4017.43,4490 4050.15,4490 4056.36,4496.21 4064.23,4488.34 4098.2,4488.34 4099.85,4490 4198.02,4490 4207.02,4499 4240.98,4499 4249.98,4490 4615,4490 5517,5392 v1(5517,6219)
A_3V3_BUF_13: P7.14 U2.20 U6.21 U7.28 | length 4105.5
  Top Layer w8: U2.20@3880.95,4310 3879,4311.95 3879,4394.98 3880.95,4396.93 3880.95,4514.06 P7.14@3800,4595 3755,4640 3755,4775 4117,5137 ; U6.21@4317.96,5460 4317.96,5395.04 4330.96,5382.04 4581.19,5382.04 4605.23,5358 4848,5358 4915,5425 4915,5501 4961,5547 U7.28@4962,5546
  Top Layer w10: 4117,5137 5018.17,5137 5353,5471.83 5353,5658.17 5204.17,5807 5042.04,5807 4961,5725.96 U7.28@4961,5547
A_3V3_BUF_14: P7.15 U2.22 U6.20 U7.29 | length 4271.6
  Top Layer w8: U2.22@3841.58,4310 3841.58,4360.42 3846,4364.85 3846,4410 3759.47,4496.53 3759.47,4614.31 3740,4633.79 3740,4655 P7.15@3700,4695 3700,4745 4109,5154 ; U6.20@4286.46,5460 4286.46,5382.54 4304,5365 4577.02,5365 4599.02,5343 4959,5343 U7.29@5062,5446
  Top Layer w10: 4109,5154 5011.12,5154 5336,5478.88 5336,5651.12 5197.12,5790 5053.67,5790 4978,5714.33 4978,5611.21 5000,5589.21 5000,5508 U7.29@5062,5446
A_3V3_BUF_15: P7.16 U2.23 U6.19 U7.3 | length 4228.2
  Top Layer w8: U2.23@3821.89,4310 3821.89,4343.4 3819.74,4343.4 3819.11,4344.03 3819.11,4359.34 3827,4367.23 3827,4407.79 3700,4534.79 P7.16@3700,4595 3660,4635 3660,4677.16 3659.47,4677.69 3659.47,4734.47 4096,5171 ; U6.19@4254.97,5460 4254.97,5392.82 4297.79,5350 4570.8,5350 4592.8,5328 4994.91,5328 5098,5431.09 5098,5460.91 5048.91,5510 5047.09,5510 5026,5531.09 5026,5585.83 5002.79,5609.05 4994,5617.83 4994,5681.21 5058.79,5746 U7.3@5062,5746
  Top Layer w10: U2.23@3821.89,4310 U2.23@3823.67,4310 ; 4096,5171 4941,5171 v1(5005,5235)
  Bottom Layer w10: v1(5005,5235) 5230,5460 5230,5740 5180,5790 5106,5790 U7.3@5062,5746
A_3V3_BUF_16: U6.18 U7.2 U8.8 | length 4381.7
  Top Layer w8: U6.18@4223.47,5460 4223.47,5371.53 4260,5335 4564.59,5335 4586.59,5313 5001.13,5313 5113,5424.87 5113,5545.91 5065.91,5593 5040.05,5593 5009,5624.05 5009,5675 5044,5710 5076.91,5710 5112.91,5746 U7.2@5162,5746
  Top Layer w10: U8.8@3528.74,4311.34 3529.18,4311.34 3530.52,4310 3530.52,4364.3 3521.43,4373.39 3521.43,4395.76 3522.37,4396.7 3522.37,4421.3 3521.43,4422.24 3521.43,4627.61 3943.82,5050 3951.27,5050 4064,5162.73 4064,5164 4088,5188 4931.08,5188 4978,5234.92 4978,5246.18 4993.82,5262 5095.08,5262 5319,5485.92 5319,5644.08 5217.08,5746 U7.2@5162,5746
A_3V3_BUF_17: U7.30 U8.9 | length 3162.5
  Top Layer w10: U8.9@3509.06,4311.34 3509.06,4361.72 3502.35,4368.42 3502.35,4378.36 3504.43,4380.43 3504.43,4402.8 3505.37,4403.75 3505.37,4414.26 3504.43,4415.2 3504.43,4657.82 3913.61,5067 3944.23,5067 4047,5169.77 4047,5177 4083,5213 4932.04,5213 4961,5241.96 4961,5253.23 4986.77,5279 5088.04,5279 5287,5477.96 5287,5642.04 5222.04,5707 5096.54,5707 5072.54,5683 5046.67,5683 5025,5661.33 5025,5630.67 5046.67,5609 5072.54,5609 5129,5552.54 5129,5546 U7.30@5162,5546
A_3V3_BUF_18: U7.1 U8.11 | length 2872.1
  Top Layer w10: U8.11@3470.35,4311.34 3470.35,4388.46 3447,4411.82 3447,4434.18 3471.46,4458.65 3471.46,4648.9 3485.35,4662.79 3908.64,5086.07 3918.58,5086.07 3920.65,5084 3937.18,5084 4030,5176.82 4030,5184.04 4075.96,5230 4925,5230 4944,5249 4944,5260.27 4979.73,5296 5009.84,5296 5270,5556.16 5270,5635 5215,5690 5106,5690 U7.1@5062,5646
A_3V3_BUF_19: U8.12
A_5V_0: U19.2 U20.4 U21.2 | length 3616.5
  Top Layer w10: U19.2@4770,2839.1 4841.9,2839.1 v1(4850,2831) ; U21.2@4776.34,3459.41 4778.12,3457.63 4815.25,3457.63 5885,2387.88 5885,2305 U20.4@6113,2077
  Bottom Layer w10: v1(4850,2831) 5604,2077 U20.4@6113,2077
A_5V_1: U19.3 U20.5 U21.3 | length 3712.7
  Top Layer w10: v1(4681,2863) 4687.69,2869.69 4721.96,2869.69 4731.18,2860.47 4768.31,2860.47 U19.3@4770,2858.78 ; U21.3@4776.34,3479.1 4778.12,3477.32 4819.61,3477.32 5902,2394.92 5902,2353.43 6078.43,2177 U20.5@6113,2177
  Bottom Layer w10: v1(4681,2863) 4856.18,2863 5542.18,2177 U20.5@6113,2177
A_5V_2: U19.5 U20.7 U21.5 | length 3542.3
  Top Layer w10: v1(4690,2906) 4707.02,2906 4713.09,2899.93 4768.22,2899.93 U19.5@4770,2898.15 ; U21.5@4776.34,3518.47 4813.47,3518.47 5954.94,2377 U20.7@6113,2377
  Bottom Layer w10: v1(4690,2906) 4783.05,2906 4792.05,2915 4823.96,2883.1 4860.13,2883.1 5366.23,2377 U20.7@6113,2377
A_5V_3: U19.6 U20.8 U21.6 | length 3301.9
  Top Layer w10: U19.6@4770,2917.84 4770.16,2918 v1(4857.17,2918) ; U21.6@4776.34,3538.15 4778.12,3536.37 4819.61,3536.37 5878.98,2477 U20.8@6113,2477
  Bottom Layer w10: v1(4857.17,2918) 4860,2918 5301,2477 U20.8@6113,2477
A_5V_4: U19.8 U20.11 U21.8 | length 3085.9
  Top Layer w10: U19.8@4770,2957.21 4845.79,2957.21 v1(4848,2955) ; U21.8@4776.34,3577.52 4778.12,3575.74 4815.25,3575.74 5562.99,2828 6062,2828 U20.11@6113,2777
  Bottom Layer w10: v1(4848,2955) 4861.18,2955 4988.18,2828 6062,2828 U20.11@6113,2777
A_5V_5: U19.9 U20.12 U21.9 | length 3219.6
  Top Layer w10: v1(4681.57,3003.25) 4702.73,3003.25 4730.98,2975 4731.09,2975.11 4768.22,2975.11 U19.9@4770,2976.89 ; U21.9@4776.34,3597.21 4778.12,3595.43 4819.61,3595.43 5538.03,2877 U20.12@6113,2877
  Bottom Layer w10: v1(4681.57,3003.25) 4778.77,3003.25 4797.81,2984.21 4915.79,2984.21 5023,2877 U20.12@6113,2877
A_5V_6: U19.11 U20.14 U21.11 | length 3171.9
  Top Layer w10: v1(4659,3033) 4716.13,3033 4731.13,3018 4766.26,3018 4768.26,3016 4769.26,3017 U19.11@4770,3016.26 ; U21.11@4776.34,3636.58 4813.47,3636.58 5373.05,3077 U20.14@6113,3077
  Bottom Layer w10: v1(4659,3033) 4773.05,3033 4788.05,3018 5335.48,3018 5394.48,3077 U20.14@6113,3077
A_5V_7: U19.12 U20.15 U21.12 | length 2937.4
  Top Layer w10: U19.12@4770,3035.95 4770.95,3035 4772.95,3037 4808.19,3037 4818.19,3047 v1(4842,3047) ; U21.12@4776.34,3656.26 4778.12,3654.48 4819.61,3654.48 5297.09,3177 U20.15@6113,3177
  Bottom Layer w10: v1(4842,3047) 4862.46,3047 4992.46,3177 U20.15@6113,3177
A_5V_8: U19.13 U20.17 U21.13 | length 3124
  Top Layer w10: v1(4677,3068) 4720.5,3068 4731.09,3057.41 4764.96,3057.41 4768.37,3054 U19.13@4770,3055.63 ; U21.13@4776.34,3675.95 4778.12,3674.17 4823.96,3674.17 5040.2,3457.93 5121.13,3377 U20.17@6113,3377
  Bottom Layer w10: v1(4677,3068) 4683,3074 4865.18,3074 5168.18,3377 U20.17@6113,3377
A_5V_9: U19.14 U20.18 U21.14 | length 2936.6
  Top Layer w10: U19.14@4770,3075.32 4820.77,3075.32 4846.46,3101 v1(4854,3101) ; U21.14@4776.34,3695.63 4826.54,3695.63 5045.17,3477 U20.18@6113,3477
  Bottom Layer w10: v1(4854,3101) 4855.14,3101 5231.14,3477 U20.18@6113,3477
ADDR0: U1.133 U2.47 U19.47 | length 2131.8
  Top Layer w8: U1.133@3520.59,3148.03 3520.59,3150.81 3671.77,3150.81 4241,3720.05 4241,3900.23 4229,3912.23 4229,3933.77 4235.28,3940.04 U2.47@4235.28,4018.66 ; v1(3799,3280) v1@3799,3281 ; v1(4239.91,2839.1) 4244,2835 4284.77,2835 4288.86,2839.1 U19.47@4478.66,2839.1
  Bottom Layer w8: v1(3799,3280) v1(4239.91,2839.1)
ADDR1: U1.134 U2.46 U19.46 | length 2092.1
  Top Layer w10: U1.134@3520.59,3167.72 3651.9,3167.72 3772,3287.82 3772,3291.18 3809.72,3328.91 v1(3813.09,3328.91) 3969,3484.82 3969,3520 4225,3776 4225,3893.6 4213,3905.6 4213,3940.4 4215.59,3942.99 U2.46@4215.59,4018.66 ; v1(4274,2861) 4276.22,2858.78 U19.46@4478.66,2858.78
  Bottom Layer w10: v1(3813.09,3328.91) 4274,2868 v1(4274,2861)
ADDR2: U1.135 U2.44 U19.44 | length 2046.8
  Top Layer w8: U1.135@3520.59,3187.4 3523.37,3184.62 3627.2,3184.62 v1@3811.58,3369 ; v1@3810,3369 v1@3811.58,3369 ; v1(3815,3369) v1@3811.58,3369 ; U2.44@4176.22,4018.66 4176.22,3970.76 4182,3964.98 4182,3875.77 4172,3865.77 4172,3844.23 4183,3833.23 4183,3756.63 3953,3526.63 3953,3510.42 v1@3811.58,3369 ; v1(4285.85,2898.15) U19.44@4478.66,2898.15
  Bottom Layer w8: v1(3815,3369) v1(4285.85,2898.15)
ADDR3: U1.136 U2.43 U19.43 | length 2037.2
  Top Layer w8: U1.136@3520.59,3207.09 3612.9,3207.09 v1(3848,3442.19) 3938,3532.19 3938,3532.84 4168,3762.84 4168,3827.02 4157,3838.02 4157,3871.98 4166,3880.98 4166,3959.77 4156.54,3969.23 U2.43@4156.54,4018.66 ; v1(4330,2925) 4334.39,2920.61 4475.88,2920.61 U19.43@4478.66,2917.84
  Top Layer w10: U2.43@4156.54,4018.66 4156.54,4023.22 U2.43@4158.31,4025
  Bottom Layer w8: v1(3848,3442.19) 3848,3380.23 4303.23,2925 v1(4330,2925)
ADDR4: U1.137 U2.41 U19.41 | length 2011.1
  Top Layer w10: U1.137@3520.59,3226.77 3522.37,3228.55 3596.47,3228.55 3776,3408.08 3776,3409.18 v1(3851.82,3485) 3889.82,3523 3906.18,3523 3922,3538.82 3922,3539.47 4132,3749.47 4132,3857.77 4133,3858.77 4133,3895.23 4128,3900.23 4128,3922.82 4116.26,3934.56 4113,3937.82 4113,3960.18 4117.17,3964.35 U2.41@4117.17,4018.66 ; v1(4307.8,2957.21) 4308,2957 4478.46,2957 U19.41@4478.66,2957.21
  Bottom Layer w10: v1(3851.82,3485) 3870,3485 3870,3458.37 3875,3453.37 3875,3431.01 3870,3426.01 3870,3395 v1(4307.8,2957.21)
ADDR5: U1.138 U2.40 U19.40 | length 1971.7
  Top Layer w10: U1.138@3520.59,3246.46 3522.37,3248.24 3592.11,3248.24 3759,3415.13 3759,3430.37 3840.63,3512 3854.77,3512 v1@3893.89,3551.11 ; v1(3895,3550) 3910,3565 3910,3567.23 4103.44,3760.67 4103.44,3863.62 4099.26,3867.81 4099.26,3927.51 4096,3930.77 4096,3967.23 4099.26,3970.49 4099.26,4016.88 U2.40@4097.48,4018.66 ; v1(4335,2984) 4342.11,2976.89 U19.40@4478.66,2976.89
  Bottom Layer w10: v1(3895,3550) 3895,3498.18 3897,3496.18 3897,3408 4321,2984 v1(4335,2984)
ADDR6: U1.139 U2.38 U19.38 | length 1947.3
  Top Layer w8: U1.139@3520.59,3266.14 3523.37,3268.92 3578.86,3268.92 3641.82,3331.88 3641.82,3340.05 4062,3760.23 4062,3830.11 4050.44,3841.67 4050.44,3863.21 4062,3874.77 4062,3979.05 4060.89,3980.16 4060.89,4015.88 U2.38@4058.11,4018.66 ; v1@3912,3609 v1(3913,3609) ; v1(4340.67,3022) 4346.41,3016.26 U19.38@4478.66,3016.26
  Bottom Layer w8: v1(3913,3609) 3928,3594 3928,3424 4340.67,3011.33 v1(4340.67,3022)
ADDR7: U1.140 U2.37 U19.37 | length 1941.8
  Top Layer w8: U1.140@3520.59,3285.83 3523.37,3288.61 3577.33,3288.61 3626.82,3338.1 3626.82,3353.43 3643.82,3370.43 3711.82,3438.43 3711.82,3439.03 3887,3614.21 3887,3619.77 3902.23,3635 3907.79,3635 3961,3688.21 3961,3718.02 4047,3804.02 4047,3823.9 4035.44,3835.46 4035.44,3869.42 4047,3880.98 4047,3972.84 4041.2,3978.64 4041.2,4015.88 U2.37@4038.43,4018.66
  Top Layer w10: v1(4365,3050) 4380.96,3050 4395.01,3035.95 U19.37@4478.66,3035.95
  Bottom Layer w10: v1(3950,3685) 3950,3436.82 4323.82,3063 4332,3063 4345,3050 v1(4365,3050)
ADDR8: U1.141 U2.36 U19.36 | length 1944
  Top Layer w8: U1.141@3520.59,3305.51 3523.37,3308.29 3575.8,3308.29 3611.82,3344.31 3611.82,3359.64 3620.03,3367.85 3628.82,3376.64 3696.82,3444.64 3696.82,3481.74 3954.08,3739 3960.77,3739 4032,3810.23 4032,3817.69 4020.44,3829.24 4020.44,3875.64 4032,3887.2 4032,3966.63 4026.2,3972.42 4026.2,3974.68 4018.74,3982.15 U2.36@4018.74,4018.66 ; v1(4337.67,3090) 4395,3090 4426.59,3058.41 4475.88,3058.41 U19.36@4478.66,3055.63
  Bottom Layer w8: v1(3925,3714) 3957.77,3714 3976,3695.77 3976,3451.67 v1(4337.67,3090)
ADDR9: U1.142 U2.35 U19.35 | length 1904.6
  Top Layer w8: U1.142@3520.59,3325.2 3520.59,3327.98 3574.27,3327.98 3596.82,3350.52 3596.82,3365.85 3613.82,3382.85 3681.82,3450.85 3681.82,3496.82 3899,3714 3899,3724.77 3914.23,3740 3925,3740 v1(3950,3765) 4005.44,3820.44 4005.44,3881.85 4017,3893.41 4017,3960.41 4011.2,3966.21 4011.2,3968.47 3999.06,3980.62 U2.35@3999.06,4018.66 ; 4397,3110 4431.68,3075.32 U19.35@4478.66,3075.32
  Top Layer w10: U2.35@3999.06,4033.22 U2.35@4000.83,4035 ; v1(4360,3120) 4360,3110 4397,3110
  Bottom Layer w10: v1(3950,3765) 3995,3720 3995,3485 v1(4360,3120)
ADDR10: U1.143 U2.33 U21.47 | length 2013.5
  Top Layer w10: U1.143@3520.59,3344.88 3522.37,3346.66 3570.33,3346.66 3580.82,3357.15 3580.82,3372.48 3665.82,3457.48 3665.82,3503.45 3883,3720.63 3883,3731.4 3907.6,3756 3918.37,3756 3923,3760.63 3923,3776.18 3964,3817.18 3964,3966.23 3959.69,3970.54 U2.33@3959.69,4018.66 3959.69,4065.58 3962.1,4068 3971.89,4068 3971.95,4068.06 3986.79,4068.06 3986.85,4068 3991.57,4068 3991.64,4068.06 4006.47,4068.06 4006.54,4068 4011.26,4068 4011.32,4068.06 4026.16,4068.06 4026.22,4068 4030.94,4068 4031.01,4068.06 4045.84,4068.06 4045.91,4068 4050.63,4068 4050.69,4068.06 4065.53,4068.06 4065.59,4068 4070.31,4068 4070.38,4068.06 4085.21,4068.06 4085.28,4068 4090,4068 4090.06,4068.06 4104.9,4068.06 4104.96,4068 4109.68,4068 4109.75,4068.06 4124.58,4068.06 4124.65,4068 4129.37,4068 4129.43,4068.06 4144.27,4068.06 4144.33,4068 4149.05,4068 4149.12,4068.06 4163.95,4068.06 4164.02,4068 4168.74,4068 4168.8,4068.06 4183.64,4068.06 4183.7,4068 4188.42,4068 4188.49,4068.06 4203.32,4068.06 4203.39,4068 4208.11,4068 4208.17,4068.06 4223.01,4068.06 4223.07,4068 4227.79,4068 4227.86,4068.06 4242.69,4068.06 4242.76,4068 4247.48,4068 4247.54,4068.06 4262.38,4068.06 4282,4048.44 4282,3905.13 4272.87,3896 4272.87,3569.05 4379.82,3462.1 4380.73,3461.19 4483.22,3461.19 U21.47@4485,3459.41
ADDR11: U1.145 U2.32 U21.46 | length 1989.3
  Top Layer w10: U1.145@3520.59,3384.25 3568.55,3384.25 3648.82,3464.52 3648.82,3510.49 3866,3727.67 3866,3738.44 3906,3778.44 3906,3783.23 3947,3824.23 3947,3959.18 3940,3966.18 U2.32@3940,4018.66 3940,4069.94 3955.06,4085 3964.85,4085 3964.91,4085.06 4269.42,4085.06 4299,4055.48 4299,3888.13 4289.87,3879 4289.87,3576.09 4386.86,3479.1 U21.46@4485,3479.1
ADDR12: U1.148 U2.30 U21.44 | length 1956
  Top Layer w10: U1.148@3520.59,3443.31 3581.62,3443.31 3631.82,3493.51 3631.82,3517.53 3641.78,3527.49 3849,3734.71 3849,3745.48 3889,3785.48 3889,3790.27 3899,3800.27 3899,3930.82 3893,3936.82 3893,3959.18 3898.85,3965.03 3898.85,4020.44 U2.30@3900.63,4018.66 3900.63,4065.58 3935.05,4100 3942.47,4100 3944.47,4102 3957.81,4102 3957.87,4102.06 4276.46,4102.06 4316,4062.52 4316,3879.73 4306.87,3870.6 4306.87,3588.13 4376.54,3518.47 U21.44@4485,3518.47
ADDR13: U1.149 U2.29 U21.43 | length 1951.6
  Top Layer w10: U1.149@3520.59,3462.99 3522.37,3464.77 3579.04,3464.77 3614.82,3500.55 3614.82,3524.57 3832,3741.75 3832,3752.52 3872,3792.52 3872,3797.31 3882,3807.31 3882,3923.77 3876,3929.77 3876,3966.23 3879.17,3969.39 U2.29@3879.17,4020.44 ; U2.29@3880.95,4018.66 U2.29@3879.17,4020.44 ; U21.43@4485,3538.15 4483.22,3539.93 4381.03,3539.93 4323.87,3597.09 4323.87,3863.56 4333,3872.69 4333,4069.57 4283.5,4119.06 3950.83,4119.06 3950.77,4119 3937.43,4119 3935.43,4117 3928.01,4117 3879.17,4068.16 U2.29@3879.17,4020.44
ADDR14: U1.150 U2.27 U21.41 | length 1983
  Top Layer w10: U1.150@3520.59,3482.68 3522.37,3484.46 3574.68,3484.46 3597.82,3507.59 3597.82,3531.61 3815,3748.79 3815,3759.56 3843.35,3787.92 3843.35,3885.46 3828,3900.82 3828,3923.18 3842,3937.18 3842,3979.23 3839.8,3981.43 3839.8,4019.82 U2.27@3841.58,4021.6 ; U2.27@3841.58,4018.66 U2.27@3841.58,4021.6 ; U21.41@4485,3577.52 4367.48,3577.52 4340.87,3604.13 4340.87,3856.52 4350,3865.65 4350,4076.61 4290.54,4136.06 3943.79,4136.06 3943.72,4136 3930.39,4136 3928.39,4134 3878.04,4134 3841.58,4097.53 U2.27@3841.58,4023.22 ; U2.27@3841.58,4021.6 U2.27@3841.58,4023.22 ; U2.27@3841.58,4021.6 3843.35,4023.38 3843.35,4025 U2.27@3841.58,4023.22
ADDR15: U1.151 U2.26 U21.40 | length 1926.1
  Top Layer w10: U1.151@3520.59,3502.36 3568.55,3502.36 3580.82,3514.63 3580.82,3538.65 3798,3755.84 3798,3766.6 3820.11,3788.72 3820.11,3884.66 3811,3893.77 3811,3930.23 3825,3944.23 3825,3972.18 3820.11,3977.07 U2.26@3820.11,4020 ; U2.26@3821.89,4018.66 3821.45,4018.66 U2.26@3820.11,4020 ; U21.40@4485,3597.21 4447.87,3597.21 4357.87,3687.21 4357.87,3849.47 4367,3858.61 4367,4083.65 4297.58,4153.06 3936.75,4153.06 3936.68,4153 3923.35,4153 3921.35,4151 3871,4151 3820.11,4100.11 U2.26@3820.11,4020
ADDR16: U1.154 U8.41 U21.38 | length 2110.9
  Top Layer w10: U1.154@3520.59,3561.42 3522.37,3563.2 3574.68,3563.2 3597.82,3586.33 3597.82,3615.25 3521.43,3691.64 3521.43,3962.76 3528.74,3970.07 U8.41@3528.74,4020 3528.74,4073.51 3534,4078.77 3534,4115.23 3532,4117.23 3532,4140.18 3561.82,4170 3847.69,4170 3849.69,4168 3914.31,4168 3916.31,4170 3929.64,4170 3929.7,4170.06 4304.63,4170.06 4384,4090.69 4384,3851.57 4374.87,3842.43 4374.87,3696.51 4433.02,3638.35 4483.22,3638.35 U21.38@4485,3636.58
ADDR17: U1.155 U8.40 U21.37 | length 2113.7
  Top Layer w10: U1.155@3520.59,3581.1 3522.37,3582.88 3570.33,3582.88 3580.82,3593.37 3580.82,3608.2 3504.43,3684.6 3504.43,3969.8 3510.83,3976.21 3510.83,4021.78 U8.40@3509.06,4020 3509.06,4077.87 3517,4085.82 3517,4108.18 3515,4110.18 3515,4147.23 3554.77,4187 3854.73,4187 3856.73,4185 3907.27,4185 3909.27,4187 3922.6,4187 3922.66,4187.06 4311.67,4187.06 4401,4097.73 4401,3844.53 4391.87,3835.39 4391.87,3703.55 4437.37,3658.04 4483.22,3658.04 U21.37@4485,3656.26
ADDR18: U1.156 U8.38 U21.36 | length 2065.9
  Top Layer w10: U1.156@3520.59,3600.79 3469.69,3651.69 U8.38@3469.69,4020 3469.69,4079.13 3463,4085.82 3463,4123 3544,4204 3618.67,4204 3618.73,4204.06 3861.71,4204.06 3863.77,4202 3900.23,4202 3902.29,4204.06 4318.71,4204.06 4418,4104.77 4418,3837.48 4408.87,3828.35 4408.87,3710.59 4441.73,3677.72 4483.22,3677.72 U21.36@4485,3675.95
ADDR19: U1.157 U8.37 U21.35 | length 1997.8
  Top Layer w10: U1.157@3423.15,3698.23 3448.22,3723.3 U8.37@3448.22,4018.22 ; U8.37@3450,4020 U8.37@3448.22,4018.22 ; U21.35@4485,3695.63 4447.87,3695.63 4425.87,3717.63 4425.87,3821.31 4435,3830.44 4435,4111.81 4325.75,4221.06 3895.25,4221.06 3893.18,4219 3870.82,4219 3868.75,4221.06 3611.69,4221.06 3611.63,4221 3516,4221 3446,4151 3446,4078.77 3448.22,4076.55 U8.37@3448.22,4018.22